# EAGLE board lisa_m_teardrops (EAGLE 6.3), part 1 of 2
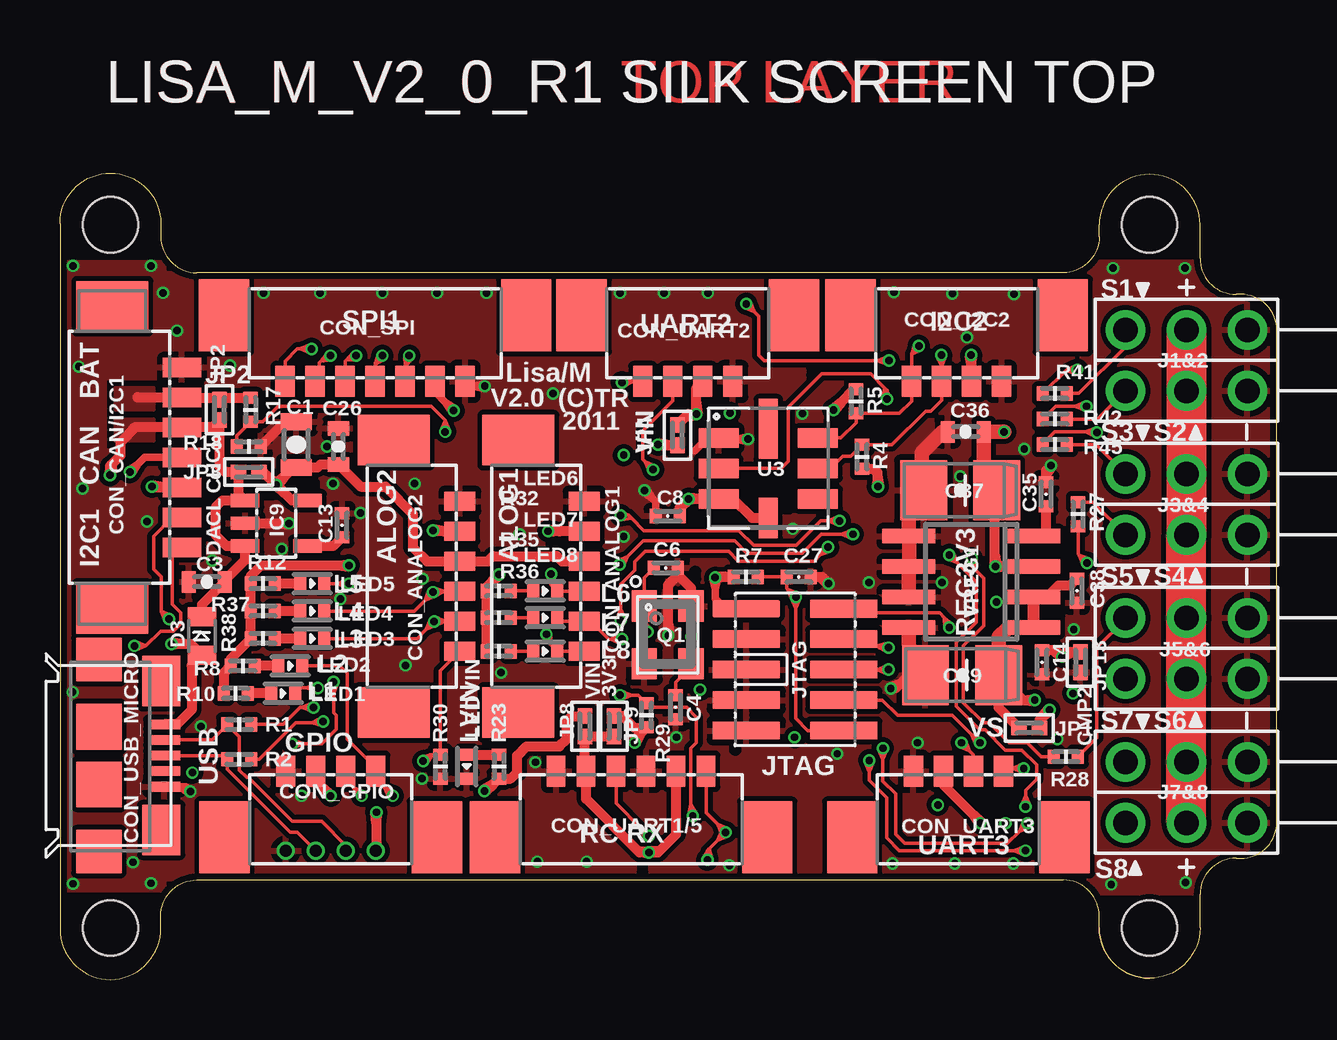
[diagram p0: board, top side]
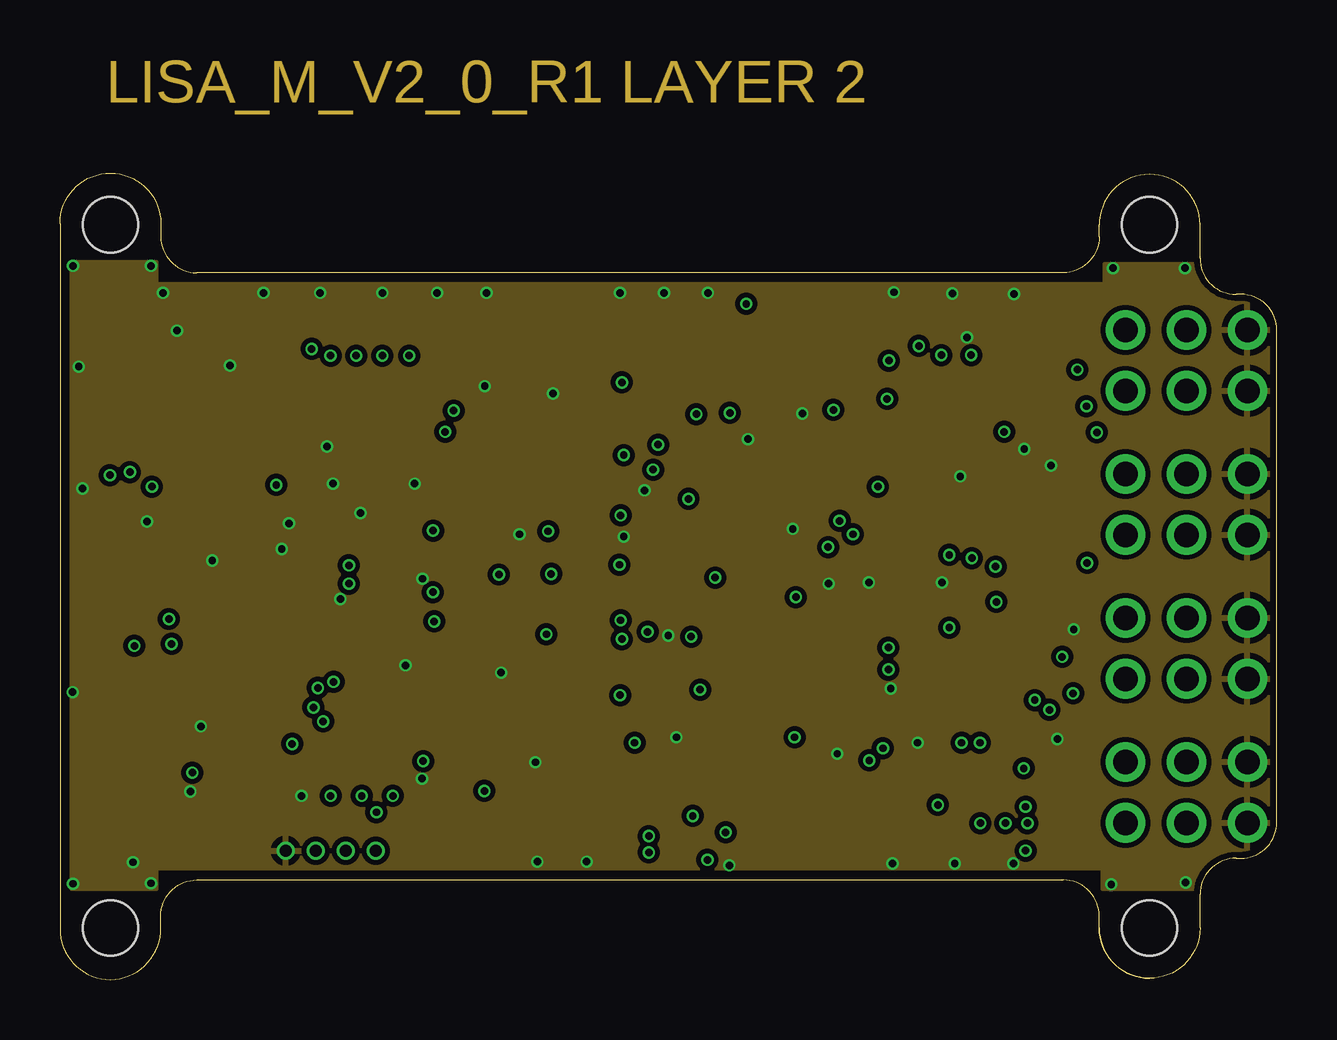
[diagram p1: board, inner layer Route2]
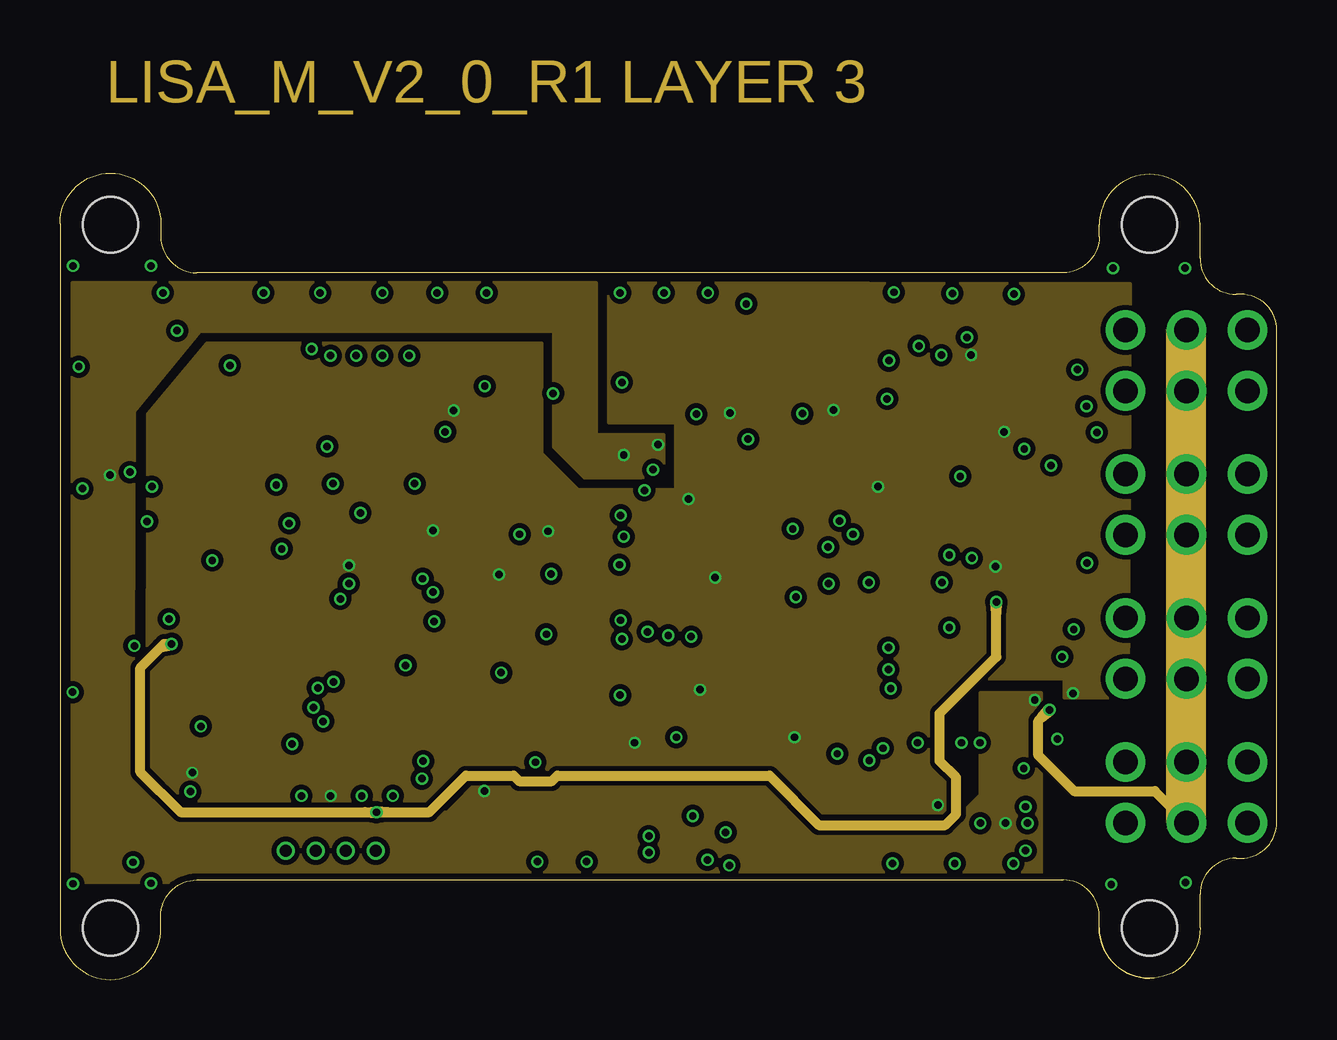
[diagram p2: board, inner layer Route15]
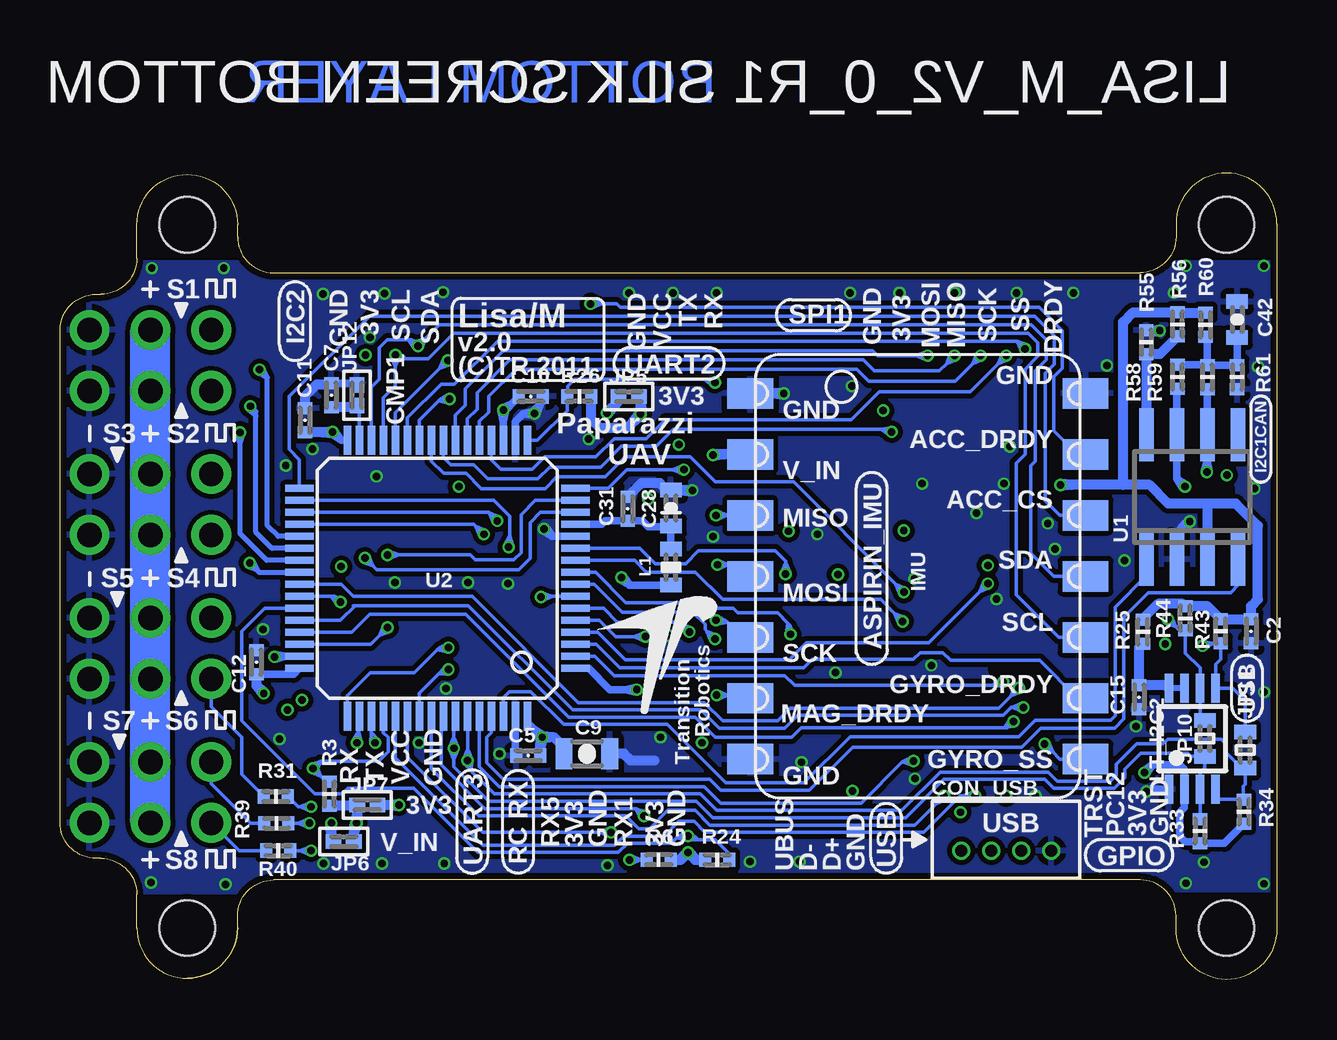
[diagram p3: board, bottom side, seen from below]

Size 50.7 x 33.6 mm. Coordinates in mm from the lower left corner, seen from the top.
Outline: 43.3,2.15 arc90 45.4,0.05
Outline: 45.4,0.05 arc-90 43.3,2.15
Outline: 43.3,2.15 43.3,2.65 arc90 41.8,4.15 5.7,4.15 arc90 4.2,2.65 4.2,2.15 arc-90 2.1,0 arc-90 0,2.1 0,31.5 arc-90 2.1,33.6 arc-90 4.2,31.5 4.2,30.95 arc90 5.7,29.45 41.8,29.45 arc90 43.3,30.95 43.3,31.45 arc-90 45.4,33.55 arc-90 47.5,31.45 47.5,30.05 arc90 49,28.55 49.2,28.55 arc-90 50.7,27.05 50.7,6.55 arc-90 49.2,5.05 49,5.05 arc90 47.5,3.55 47.5,2.15 arc-90 45.4,0.05
Copper layers (1*2+15*16): Top 0.035mm / dielectric 0.2mm / Route2 0.035mm / dielectric 1.5mm / Route15 0.035mm / dielectric 0.2mm / Bottom 0.035mm
Design rules "default": minimum track width 0.15mm, minimum drill 0.3mm, track to track 0.15mm, track to pad 0.15mm, pad to pad 0.15mm, via to via 0.15mm, smd to smd 0.15mm, copper to edge 10mil, drill to drill 8mil, minimum pad ring 0.1mm, minimum via ring 0.1mm, stop-mask expansion 14mil, vias tented up to drill 0.31mm, thermal gap 10mil
Net classes: 0 default: width 0.152 mm, drill 0.305 mm, clearance 0.152 mm
Holes 2.3 mm at 2.1,2.15 2.1,31.45 45.4,31.45 45.4,2.15
tKeepout: area 0.1,0.2 to 4.1,4.2; area 43.4,0.2 to 47.4,4.2; area 0.1,29.5 to 4.1,33.5; area 43.4,29.5 to 47.4,33.5
tRestrict: area 41.6,15.2 to 41.7,15.4; area 39.5,15.1 to 39.6,15.5; area 40.3,20.3 to 40.6,20.3; area 27.3,23.2 to 27.6,23.3; area 31.3,25.2 to 31.4,25.5; area 26.4,16.7 to 26.5,17; area 24.9,16.4 to 25,16.6; area 7.4,16.3 to 7.5,16.5; area 13.2,21 to 13.5,21.1; area 40.4,13 to 40.7,13.1; area 35.8,17.8 to 36.1,17.9; area 22.8,17.6 to 22.9,17.7; 12 more areas
bRestrict: area 2.3,26.9 to 2.5,27; area 2,20.3 to 2.1,20.5; area 2.2,24.5 to 2.3,24.7; area 7.9,23.5 to 8.1,23.6; area 3.5,16.8 to 3.6,17; area 4.8,16.8 to 4.9,17; area 0.4,14.5 to 0.5,14.6; area 5.1,10.4 to 5.2,10.6; area 11.7,12.8 to 11.8,13; area 27.5,20 to 27.6,20.2; area 30.5,24.7 to 30.7,24.9; area 31.3,9.9 to 31.4,10.1; 3 more areas

## Footprints (pad centres in the part's own frame; a part is rotated, then mirrored left to right if it is on the bottom)
0805-CAP = smd 0.7 x 1.3: P$1 -0.95,0; P$2 0.95,0
0402-CAP = smd 0.5 x 0.6: P$1 -0.5,0; P$2 0.5,0
0603-CAP = smd 0.6 x 0.9: P$1 -0.75,0; P$2 0.75,0
0603-POL-CAP = smd 0.6 x 0.9: + -0.75,0; - 0.75,0
3528/B = smd 1.95 x 2.5: + -1.525,0; - 1.525,0
PB-53398-06 = smd 0.8 x 1.3: 1 -3.125,1.25; 2 -1.875,1.25; 3 -0.625,1.25; 4 0.625,1.25; 5 1.875,1.25; 6 3.125,1.25 | smd 2.1 x 3: PAD1 -5.675,-1.5; PAD2 5.675,-1.5
PB-53261-07 = smd 0.8 x 1.6: 1 -3.75,1.1; 2 -2.5,1.1; 3 -1.25,1.1; 4 0,1.1; 5 1.25,1.1; 6 2.5,1.1; 7 3.75,1.1 | smd 2.1 x 3: MNT1 -6.3,-1.8; MNT2 6.3,-1.8
PB-53398-04 = smd 0.8 x 1.3: 1 -1.875,1.25; 2 -0.625,1.25; 3 0.625,1.25; 4 1.875,1.25 | smd 2.1 x 3: PAD1 -4.425,-1.5; PAD2 4.425,-1.5
PB-53398-07 = smd 0.8 x 1.3: 1 -3.75,1.25; 2 -2.5,1.25; 3 -1.25,1.25; 4 0,1.25; 5 1.25,1.25; 6 2.5,1.25; 7 3.75,1.25 | smd 2.1 x 3: PAD1 -6.3,-1.5; PAD2 6.3,-1.5
PB-53398-06' = smd 0.775 x 1.3: 1 -3.125,1.25; 2 -1.875,1.25; 3 -0.625,1.25; 4 0.625,1.25; 5 1.875,1.25; 6 3.125,1.25 | smd 2.1 x 3: PAD1 -5.675,-1.5; PAD2 5.675,-1.5
PB-53047-04 = drill 0.5: 1 -1.875,0; 2 -0.625,0; 3 0.625,0; 4 1.875,0
ZX62-B-5PA = smd 1.8 x 1.9: GND_LEFT -4,0; GND_RIGHT 4,0 | smd 1.9 x 1.9: GND_MID_LEFT -1.2,0; GND_MID_RIGHT 1.2,0 | smd 2.1 x 1.6: GND_UP_LEFT -3.1,2.6; GND_UP_RIGHT 3.1,2.6 | smd 0.4 x 1.35: PIN_1 -1.3,2.725; PIN_2 -0.65,2.725; PIN_3 0,2.725; PIN_4 0.65,2.725; PIN_5 1.3,2.725
MICROMELF-R = smd 0.8 x 1.2: A 0.8,0; C -0.8,0
SOT23-5 = smd 0.55 x 1.2: 1 -0.95,-1.3; 2 0,-1.3; 3 0.95,-1.3; 4 0.95,1.3; 5 -0.95,1.3
ASPIRIN_1 = smd 1.905 x 1.27: P$1 -6.985,7.62; P$2 -6.985,5.08; P$3 -6.985,2.54; P$4 -6.985,0; P$5 -6.985,-2.54; P$6 -6.985,-5.08; P$7 -6.985,-7.62; P$8 6.985,-7.62; P$9 6.985,-5.08; P$10 6.985,-2.54; P$11 6.985,0; P$12 6.985,2.54; P$13 6.985,5.08; P$14 6.985,7.62
SIP1X3_100 = drill 1.016 pad 1.651: 1 2.54,0; 2 0,0; 3 -2.54,0
0402-SQJMP = smd 0.652 x 0.6: P$1 -0.424,0; P$2 0.424,0
0603-RES = smd 0.6 x 0.9: P$1 -0.75,0; P$2 0.75,0
FTSH-105-DV = smd 0.74 x 2.8: 1 -2.54,-2.03; 2 -2.54,2.03; 3 -1.27,-2.03; 4 -1.27,2.03; 5 0,-2.03; 6 0,2.03; 7 1.27,-2.03; 8 1.27,2.03; 9 2.54,-2.03; 10 2.54,2.03
0603-IND = smd 0.6 x 0.9: P$1 -0.75,0; P$2 0.75,0
0402-LED = smd 0.5 x 0.6: A 0.5,0; C -0.5,0
TSSOP_B3 = smd 1.2 x 0.35: 1 -2.925,0.975; 2 -2.925,0.325; 3 -2.925,-0.325; 4 -2.925,-0.975; 5 1.275,-0.975; 6 1.275,-0.325; 7 1.275,0.325; 8 1.275,0.975
ABM8 = smd 1.3 x 1.05: P$1 -1.2,-0.975; P$2 1.2,-0.975; P$3 1.2,0.975; P$4 -1.2,0.975
0402-RES = smd 0.5 x 0.6: P$1 -0.5,0; P$2 0.5,0
SO-08 = smd 0.6 x 2.2: 1 -1.905,-2.6; 2 -0.635,-2.6; 3 0.635,-2.6; 4 1.905,-2.6; 5 1.905,2.6; 6 0.635,2.6; 7 -0.635,2.6; 8 -1.905,2.6
LQFP64 = smd 1.2 x 0.3: 1 -5.75,3.75; 2 -5.75,3.25; 3 -5.75,2.75; 4 -5.75,2.25; 5 -5.75,1.75; 6 -5.75,1.25; 7 -5.75,0.75; 8 -5.75,0.25; 9 -5.75,-0.25; 10 -5.75,-0.75; 11 -5.75,-1.25; 12 -5.75,-1.75; 13 -5.75,-2.25; 14 -5.75,-2.75; 15 -5.75,-3.25; 16 -5.75,-3.75; 33 5.75,-3.75; 34 5.75,-3.25; 35 5.75,-2.75; 36 5.75,-2.25; 37 5.75,-1.75; 38 5.75,-1.25; 39 5.75,-0.75; 40 5.75,-0.25; 41 5.75,0.25; 42 5.75,0.75; 43 5.75,1.25; 44 5.75,1.75; 45 5.75,2.25; 46 5.75,2.75; 47 5.75,3.25; 48 5.75,3.75 | smd 0.3 x 1.2: 17 -3.75,-5.75; 18 -3.25,-5.75; 19 -2.75,-5.75; 20 -2.25,-5.75; 21 -1.75,-5.75; 22 -1.25,-5.75; 23 -0.75,-5.75; 24 -0.25,-5.75; 25 0.25,-5.75; 26 0.75,-5.75; 27 1.25,-5.75; 28 1.75,-5.75; 29 2.25,-5.75; 30 2.75,-5.75; 31 3.25,-5.75; 32 3.75,-5.75; 49 3.75,5.75; 50 3.25,5.75; 51 2.75,5.75; 52 2.25,5.75; 53 1.75,5.75; 54 1.25,5.75; 55 0.75,5.75; 56 0.25,5.75; 57 -0.25,5.75; 58 -0.75,5.75; 59 -1.25,5.75; 60 -1.75,5.75; 61 -2.25,5.75; 62 -2.75,5.75; 63 -3.25,5.75; 64 -3.75,5.75
LCC8 = smd 1.67 x 0.8: 1 -2.065,1.27; 2 -2.065,0; 3 -2.065,-1.27; 5 2.065,-1.27; 6 2.065,0; 7 2.065,1.27 | smd 0.8 x 1.67: 4 0,-2.065 | smd 0.8 x 2.5: 8 0,1.65
SOIC8 = smd 0.6 x 2.2: 1 -1.905,-2.6; 2 -0.635,-2.6; 3 0.635,-2.6; 4 1.905,-2.6; 5 1.905,2.6; 6 0.635,2.6; 7 -0.635,2.6; 8 -1.905,2.6

## Placement (x,y rotation side)
C1  4u7  [0805-CAP]  9.85,22.29 90 top
C2  100n  [0402-CAP]  1.07,14.51 270 bottom
C3  100n  [0603-CAP]  6.12,16.57 180 top
C4  10p  [0402-CAP]  25.65,11.34 90 top
C5  100n  [0402-CAP]  31.19,9.33 0 bottom
C6  10p  [0402-CAP]  25.25,17.15 0 top
C7  100n  [0402-CAP]  39.4,24.34 270 bottom
C8  100n  [0402-CAP]  25.32,19.31 0 top
C9  4u7  [0805-CAP]  28.75,9.41 0 bottom
C10  100n  [0402-CAP]  31.08,24.29 180 bottom
C11  100n  [0402-CAP]  40.49,23.31 270 bottom
C12  100n  [0402-CAP]  42.52,13.22 270 bottom
C13  10n  [0402-CAP]  11.75,18.93 90 top
C14  100n  [0402-CAP]  40.92,13.22 90 top
C15  100n  [0402-CAP]  5.73,11.77 270 bottom
C26  100n  [0603-CAP]  11.6,22.21 90 top
C27  100n  [0402-CAP]  30.79,16.77 180 top
C28  1u  [0603-POL-CAP]  25.24,19.64 90 bottom
C31  10n  [0402-CAP]  27.05,19.62 270 bottom
C35  470p  [0402-CAP]  41.09,20.23 90 top
C36  100n  [0603-CAP]  37.74,22.82 180 top
C37  22u  [3528/B]  37.51,20.38 180 top
C38  100n  [0402-CAP]  42.37,16.19 270 top
C39  22u  [3528/B]  37.59,12.68 180 top
C42  4n7  [0603-CAP]  1.65,27.5 270 bottom
CON_ANALOG1  [PB-53398-06]  20.59,16.8 270 top
CON_ANALOG2  [PB-53398-06]  15.41,16.8 270 top
CON_CAN/I2C1  [PB-53261-07]  3.98,21.75 270 top
CON_GPIO  [PB-53398-04]  11.28,7.43 0 top
CON_I2C2  [PB-53398-04]  37.36,26.17 180 top
CON_SPI  [PB-53398-07]  13.13,26.17 180 top
CON_UART1/5  [PB-53398-06']  23.79,7.43 0 top
CON_UART2  [PB-53398-04]  26.16,26.17 180 top
CON_UART3  [PB-53398-04]  37.43,7.43 0 top
CON_USB  [PB-53047-04]  11.28,5.37 0 bottom
CON_USB_MICRO  ZX62-B-5PA  [ZX62-B-5PA]  1.62,9.33 270 top
D3  1N5819  [MICROMELF-R]  5.91,14.31 270 top
IC9  LP2992 5V  [SOT23-5]  9.01,19.01 270 top
IMU  ASPIRIN  [ASPIRIN_1]  14.96,16.8 0 bottom
J1  CONN_3-1  [SIP1X3_100]  46.94,27.07 0 top
J2  CONN_3-1  [SIP1X3_100]  46.94,24.53 0 top
J3  CONN_3-1  [SIP1X3_100]  46.94,21.07 0 top
J4  CONN_3-1  [SIP1X3_100]  46.94,18.53 0 top
J5  CONN_3-1  [SIP1X3_100]  46.94,15.07 0 top
J6  CONN_3-1  [SIP1X3_100]  46.94,12.53 0 top
J7  CONN_3-1  [SIP1X3_100]  46.94,9.07 0 top
J8  CONN_3-1  [SIP1X3_100]  46.94,6.53 0 top
JP1  0/DNP  [0402-SQJMP]  40.39,10.47 180 top
JP2  0/DNP  [0402-SQJMP]  6.65,23.73 90 top
JP3  0/DNP  [0402-SQJMP]  7.87,21.14 0 top
JP4  0/DNP  [0402-SQJMP]  25.73,22.69 90 top
JP5  0/DNP  [0402-SQJMP]  27.01,24.29 0 bottom
JP6  0/DNP  [0402-SQJMP]  38.88,5.75 0 bottom
JP7  0/DNP  [0402-SQJMP]  37.89,7.27 180 bottom
JP8  0/DNP  [0402-SQJMP]  21.87,10.55 270 top
JP9  0/DNP  [0402-SQJMP]  23.09,10.55 270 top
JP10  0/DNP  [0603-RES]  2.99,10.04 90 bottom
JP11  0/DNP  [0603-RES]  1.32,9.56 90 bottom
JP12  0/DNP  [0402-SQJMP]  38.33,24.34 90 bottom
JP13  0/DNP  [0402-SQJMP]  42.52,13.22 270 top
JTAG  PIN_HDR_EDG_1.27MM_5-2  [FTSH-105-DV]  30.63,12.91 270 top
L1  [0603-IND]  25.24,17.18 90 bottom
LED1  RED  [0402-LED]  9.3,11.92 180 top
LED2  GRN  [0402-LED]  9.6,13.07 180 top
LED3  GRN  [0402-LED]  10.52,14.21 180 top
LED4  RED  [0402-LED]  10.52,15.35 180 top
LED5  GRN  [0402-LED]  10.52,16.49 180 top
LED6  BLU  [0402-LED]  20.22,16.19 180 top
LED7  BLU  [0402-LED]  20.22,15.07 180 top
LED8  BLU  [0402-LED]  20.22,13.68 180 top
LEDVIN  GRN  [0402-LED]  16.95,8.87 90 top
LT_I2C2  PCA9306DP  [TSSOP_B3]  3.52,10.86 90 bottom
Q1  12Mhz  [ABM8]  25.32,14.36 270 top
R1  0R  [0402-RES]  7.47,10.63 0 top
R2  0R  [0402-RES]  7.47,9.18 0 top
R3  10k  [0402-RES]  39.47,7.73 90 bottom
R4  2k2  [0402-RES]  33.42,21.78 90 top
R5  2k2  [0402-RES]  33.17,24.09 270 top
R6  10k  [0402-RES]  25.76,4.99 180 bottom
R7  10k  [0402-RES]  28.58,16.77 180 top
R8  300  [0402-RES]  7.62,13.07 180 top
R10  300  [0402-RES]  7.32,11.92 180 top
R12  300  [0402-RES]  8.46,16.49 180 top
R17  10k  [0402-RES]  7.94,23.73 270 top
R18  2k2  [0402-RES]  7.87,22.21 0 top
R23  2k2  [0402-RES]  18.29,8.87 270 top
R24  10k  [0402-RES]  23.32,4.99 0 bottom
R25  200k  [0402-RES]  5.58,14.49 90 bottom
R26  10k  [0402-RES]  29.06,24.29 180 bottom
R27  100R  [0402-RES]  42.42,19.39 270 top
R28  100R  [0402-RES]  41.91,9.28 180 top
R29  10k  [0402-RES]  24.43,11.01 90 top
R30  10k  [0402-RES]  15.85,8.87 90 top
R31  100R  [0402-RES]  41.71,7.63 0 bottom
R32  80R  [0402-RES]  18.29,16.19 180 top
R33  2k2  [0402-RES]  3.2,6.19 270 bottom
R34  2k2  [0402-RES]  1.37,6.99 270 bottom
R35  80R  [0402-RES]  18.29,15.07 180 top
R36  80R  [0402-RES]  18.29,13.68 180 top
R37  300  [0402-RES]  8.46,15.35 180 top
R38  300  [0402-RES]  8.46,14.21 180 top
R39  100R  [0402-RES]  41.68,6.51 0 bottom
R40  100R  [0402-RES]  41.61,5.37 0 bottom
R41  100R  [0402-RES]  41.45,24.42 180 top
R42  100R  [0402-RES]  41.45,23.35 180 top
R43  2k2  [0402-RES]  2.34,14.51 90 bottom
R44  2k2  [0402-RES]  3.81,15.05 90 bottom
R45  100R  [0402-RES]  41.45,22.29 180 top
R55  0/10k  [0402-RES]  5.44,26.55 270 bottom
R56  0/DNP  [0402-RES]  4.14,27.3 90 bottom
R58  60R/DNP  [0402-RES]  4.14,25.11 90 bottom
R59  60R/DNP  [0402-RES]  2.9,25.1 270 bottom
R60  4k7/DNP  [0402-RES]  2.97,27.28 270 bottom
R61  4k7/DNP  [0402-RES]  1.65,25.1 270 bottom
U1  MCP2551SN  [SO-08]  3.52,20.1 0 bottom
U2  STM32-C-64  [LQFP64]  34.97,16.71 180 bottom
U3  BMP085  [LCC8]  29.51,21.3 0 top
U$1  TR-LOGO  [TR-LOGO]  25.82,13.51 0 bottom
VREG1  MIC5209  [SOIC8]  37.97,16.57 90 top

## Library data of the parts
C1 C9 = pel_dipol_comp; PARTNO: cap-cer-0805-4u7
C2 C5 C7 C8 C10-C12 C14 C15 C27 C38 = pel_dipol_comp; PARTNO: cap-cer-0402-100n
C3 C26 C36 = pel_dipol_comp; PARTNO: cap-cer-0603-100n
C4 C6 = pel_dipol_comp; PARTNO: cap-cer-0402-10p
C13 C31 = pel_dipol_comp; PARTNO: cap-cer-0402-10n
C28 = pel_dipol_comp; PARTNO: cap-tan-0603-1u
C35 = pel_dipol_comp; PARTNO: cap-cer-0402-470p
C37 C39 = pel_dipol_comp; PARTNO: cap-tan-B-22u-16v
C42 = pel_dipol_comp; PARTNO: cap-cer-0603-4n7
CON_ANALOG1 CON_ANALOG2 = pel_molex; PARTNO: conn-picoblade-smd-0.05in-6-vert
CON_CAN/I2C1 CON_SPI = pel_molex; PARTNO: conn-picoblade-smd-0.05in-7-vert
CON_GPIO CON_I2C2 CON_UART2 CON_UART3 = pel_molex; PARTNO: conn-picoblade-smd-0.05in-4-vert
CON_UART1/5 = joby_robotics; PARTNO: conn-picoblade-smd-0.05in-6-vert
CON_USB = pel_molex; DNP: T; PARTNO: conn-picoblade-th-0.05in-4-vert
CON_USB_MICRO = open-bldc; PARTNO: conn-smd-usb-micro-b
D3 = diode; PARTNO: diode-schottky-1608
IC9 = open-bldc; PARTNO: vreg-sot-23-5-5v
IMU = joby_robotics; PARTNO: pcb-ass-aspirin
J1-J4 = pel_misc; PARTNO: conn-th-0.1in-3-2-ra
J5-J8 = pel_misc; DNP: T; PARTNO: conn-th-0.1in-3-2-ra
JP1-JP4 JP7 JP8 = pel_jumpers; DNP: T; PARTNO: res-0402-0
JP5 JP6 JP9 JP12 JP13 = pel_jumpers; PARTNO: res-0402-0
JP10 JP11 = pel_dipol_comp; DNP: T; PARTNO: res-0603-0
JTAG = pel_misc; PARTNO: conn-smd-0.05in-5-2
L1 = res_cap; PARTNO: ferrite-0603-600ohm
LED1 LED4 = pel_dipol_comp; PARTNO: led-0402-red
LED2 LED3 LED5 LEDVIN = pel_dipol_comp; PARTNO: led-0402-green
LED6-LED8 = pel_dipol_comp; DNP: T; PARTNO: led-0402-blue
LT_I2C2 = booz; PARTNO: ic-tssop8-level-trans
Q1 = booz; PARTNO: xtal-abm8-12mhz
R1 R2 = pel_dipol_comp; PARTNO: res-0402-0
R3 R6 R7 R17 R24 R26 R29 R30 R55 = pel_dipol_comp; PARTNO: res-0402-10k
R4 R5 R18 R23 R33 R34 R43 R44 = pel_dipol_comp; PARTNO: res-0402-2k2
R8 R10 R12 R37 R38 = pel_dipol_comp; PARTNO: res-0402-300
R25 = pel_dipol_comp; PARTNO: res-0402-200k
R27 R28 R31 R39-R42 R45 = pel_dipol_comp; PARTNO: res-0402-100
R32 R35 R36 = pel_dipol_comp; DNP: T; PARTNO: res-0402-80
R56 = pel_dipol_comp; DNP: T; PARTNO: res-0402-0
R58 R59 = pel_dipol_comp; PARTNO: res-0402-60.4
R60 R61 = pel_dipol_comp; DNP: T; PARTNO: res-0402-4k7
U1 = microchip_can; PARTNO: ic-so8-can
U2 = pel_stm32; FLASH: 256KB; PARTNO: mcu-lqfp-64-stm32; PART_NR: STM32F105RCT6; RAM: 64KB
U3 = omc; PARTNO: sensr-clcc-8-baro
U$1 = quadshot; BOM: EXCLUDE; PARTNO: *
VREG1 = paparazzi; PARTNO: vreg-so8-3v3

## Nets
+3V3: C5.P$2 C8.P$2 C9.P$1 C10.P$2 C11.P$2 C12.P$2 C36.P$1 C37.+ CON_ANALOG1.2 CON_ANALOG2.2 CON_GPIO.2 CON_I2C2.2 CON_SPI.2 JP5.P$1 JP7.P$1 JP9.P$1 JTAG.1 L1.P$1 LT_I2C2.2 R4.P$1 R5.P$1 R7.P$2 R8.P$2 R10.P$2 R12.P$2 R29.P$1 R32.P$2 R33.P$2 R34.P$2 R35.P$2 R36.P$2 R37.P$2 R38.P$2 U2.1 U2.19 U2.32 U2.48 U2.64 U3.3 U3.4 VREG1.3
+5V: C1.P$1 C2.P$1 C26.P$1 CON_ANALOG1.3 CON_ANALOG2.3 IC9.5 JP3.P$2 R25.P$2 R43.P$2 R44.P$2 R56.P$2 R60.P$1 U1.3
ADC_1: CON_ANALOG1.4 LED6.C U2.11
ADC_2: CON_ANALOG1.5 LED7.C U2.8
ADC_3: CON_ANALOG1.6 LED8.C U2.9
ADC_4: CON_ANALOG2.4 LED4.C U2.25
ADC_6: CON_ANALOG2.5 LED3.C U2.10
BARO_DRDY: U2.26 U3.2
BOOT0: CON_ANALOG2.6 R30.P$2 U2.60
CAN_CENTER: C42.P$2 R58.P$2 R59.P$1 R60.P$2 R61.P$1
CAN_H: CON_CAN/I2C1.5 R58.P$1 U1.7
CAN_L: CON_CAN/I2C1.4 R59.P$2 U1.6
CAN_RX: U1.4 U2.61
CAN_TX: U1.1 U2.62
EXTSPI_DRDY: CON_SPI.7 U2.27
EXTSPI_MISO: CON_SPI.4 U2.22
EXTSPI_MOSI: CON_SPI.3 U2.23
EXTSPI_SCK: CON_SPI.5 U2.21
EXTSPI_SS: CON_SPI.6 U2.20
FT_USB_DM: CON_USB.2 CON_USB_MICRO.PIN_2 R1.P$1
FT_USB_DP: CON_USB.3 CON_USB_MICRO.PIN_3 R2.P$1
GND: C1.P$2 C2.P$2 C3.P$2 C4.P$1 C5.P$1 C6.P$2 C7.P$1 C8.P$1 C9.P$2 C10.P$1 C11.P$1 C12.P$1 C13.P$2 C14.P$1 C15.P$2 C26.P$2 C27.P$1 C28.- C31.P$1 C35.P$2 C36.P$2 C37.- C38.P$2 C39.- C42.P$1 CON_ANALOG1.1 CON_ANALOG2.1 CON_CAN/I2C1.1 CON_GPIO.1 CON_I2C2.1 CON_SPI.1 CON_UART1/5.1 CON_UART1/5.4 CON_UART2.1 CON_UART3.1 CON_USB.4 CON_USB_MICRO.PIN_5 IC9.2 IMU.P$1 IMU.P$7 IMU.P$14 J1.1 J2.1 J3.1 J4.1 J5.1 J6.1 J7.1 J8.1 JP12.P$2 JP13.P$2 JTAG.3 JTAG.5 JTAG.7 JTAG.9 LEDVIN.C LT_I2C2.1 Q1.P$2 Q1.P$4 R18.P$2 R30.P$1 R55.P$1 R61.P$2 U1.2 U2.12 U2.18 U2.63 U3.1 VREG1.5 VREG1.6 VREG1.7 VREG1.8
I2C2_SCL: CON_I2C2.3 IMU.P$10 R4.P$2 U2.29 U3.6
I2C2_SDA: CON_I2C2.4 IMU.P$11 R5.P$2 U2.30 U3.7
IMU_ACC_CS: IMU.P$12 U2.33
IMU_ACC_DRDY: IMU.P$13 U2.28
IMU_GYRO_DRDY: IMU.P$9 U2.3
IMU_GYRO_SS: IMU.P$8 U2.2
IMU_MAG_DRDY: IMU.P$6 R29.P$2 U2.57
IMU_SPI_MISO: IMU.P$3 U2.35
IMU_SPI_MOSI: IMU.P$4 U2.36
IMU_SPI_SCK: IMU.P$5 U2.34
JTAG_RST: C27.P$2 JTAG.10 R7.P$1 U2.7
JTAG_TCK: JTAG.4 U2.49
JTAG_TDI: JTAG.8 U2.50
JTAG_TDO: JTAG.6 U2.55
JTAG_TMS: JTAG.2 U2.46
JTAG_TRST: CON_GPIO.4 LED2.C U2.56
LED1: LED1.C U2.41
LED2: LED5.C U2.4
LT_I2C1_SCL: CON_CAN/I2C1.6 JP10.P$2 LT_I2C2.6 R44.P$1
LT_I2C1_SDA: CON_CAN/I2C1.7 JP11.P$2 LT_I2C2.5 R43.P$1
N$1: R55.P$2 R56.P$1 U1.8
N$4: LED1.A R10.P$1
N$5: LED6.A R32.P$1
N$6: C13.P$1 IC9.4
N$7: C35.P$1 VREG1.4
N$8: C15.P$1 LT_I2C2.7 LT_I2C2.8 R25.P$1
N$9: LED7.A R35.P$1
N$10: LED2.A R8.P$1
N$11: LED8.A R36.P$1
N$12: LEDVIN.A R23.P$1
N$13: LED5.A R12.P$1
N$14: LED4.A R37.P$1
N$15: LED3.A R38.P$1
OSC_IN: C4.P$2 Q1.P$3 U2.5
OSC_OUT: C6.P$1 Q1.P$1 U2.6
PC12: CON_GPIO.3 U2.53
S1: J1.3 R41.P$1
S2: J2.3 R42.P$1
S3: J3.3 R45.P$1
S4: J4.3 R27.P$1
S5: J5.3 R28.P$1
S6: J6.3 R31.P$1
S7: J7.3 R39.P$1
S8: J8.3 R40.P$1
SERVO_1: R41.P$2 U2.37
SERVO_2: R42.P$2 U2.38
SERVO_3: R45.P$2 U2.39
SERVO_4: R27.P$2 U2.40
SERVO_5: R28.P$2 U2.14
SERVO_6: R31.P$2 U2.15
SERVO_7/I2C1_SCL: JP10.P$1 LT_I2C2.3 R33.P$1 R39.P$2 U2.58
SERVO_8/I2C1_SDA: JP11.P$1 LT_I2C2.4 R34.P$1 R40.P$2 U2.59
SERVO_BUS: J1.2 J2.2 J3.2 J4.2 J5.2 J6.2 J7.2 J8.2 JP1.P$1
U1_U5_POW: CON_UART1/5.2 CON_UART1/5.5 JP8.P$2 JP9.P$2 R6.P$1 R24.P$1
U2_POW: CON_UART2.2 JP4.P$2 JP5.P$2 R26.P$1
U3_POW: CON_UART3.2 JP6.P$2 JP7.P$2 R3.P$1
UART1_RX: CON_UART1/5.3 R24.P$2 U2.43
UART2_RX: CON_UART2.4 R26.P$2 U2.17
UART2_TX: CON_UART2.3 U2.16
UART3_RX: CON_UART3.4 R3.P$2 U2.52
UART3_TX: CON_UART3.3 U2.51
UART5_RX: CON_UART1/5.6 R6.P$2 U2.54
USB_DM: R1.P$2 U2.44
USB_DP: R2.P$2 U2.45
USB_VBUS: CON_USB.1 CON_USB_MICRO.PIN_1 D3.A U2.42
V_BAT: CON_CAN/I2C1.2 JP2.P$2 R17.P$1
V_BAT_MEAS: R17.P$2 R18.P$1 U2.24
V_IN: C3.P$1 C38.P$1 C39.+ CON_CAN/I2C1.3 D3.C IC9.1 IC9.3 IMU.P$2 JP1.P$2 JP2.P$1 JP3.P$1 JP4.P$1 JP6.P$1 JP8.P$1 R23.P$2 VREG1.1 VREG1.2
VDDA: C28.+ C31.P$2 L1.P$2 U2.13
VREF: U1.5
VSS1: C7.P$2 JP12.P$1 U2.31
VSS2: C14.P$2 JP13.P$1 U2.47